# EAGLE board Power Board Rev A (EAGLE 6.5.0)
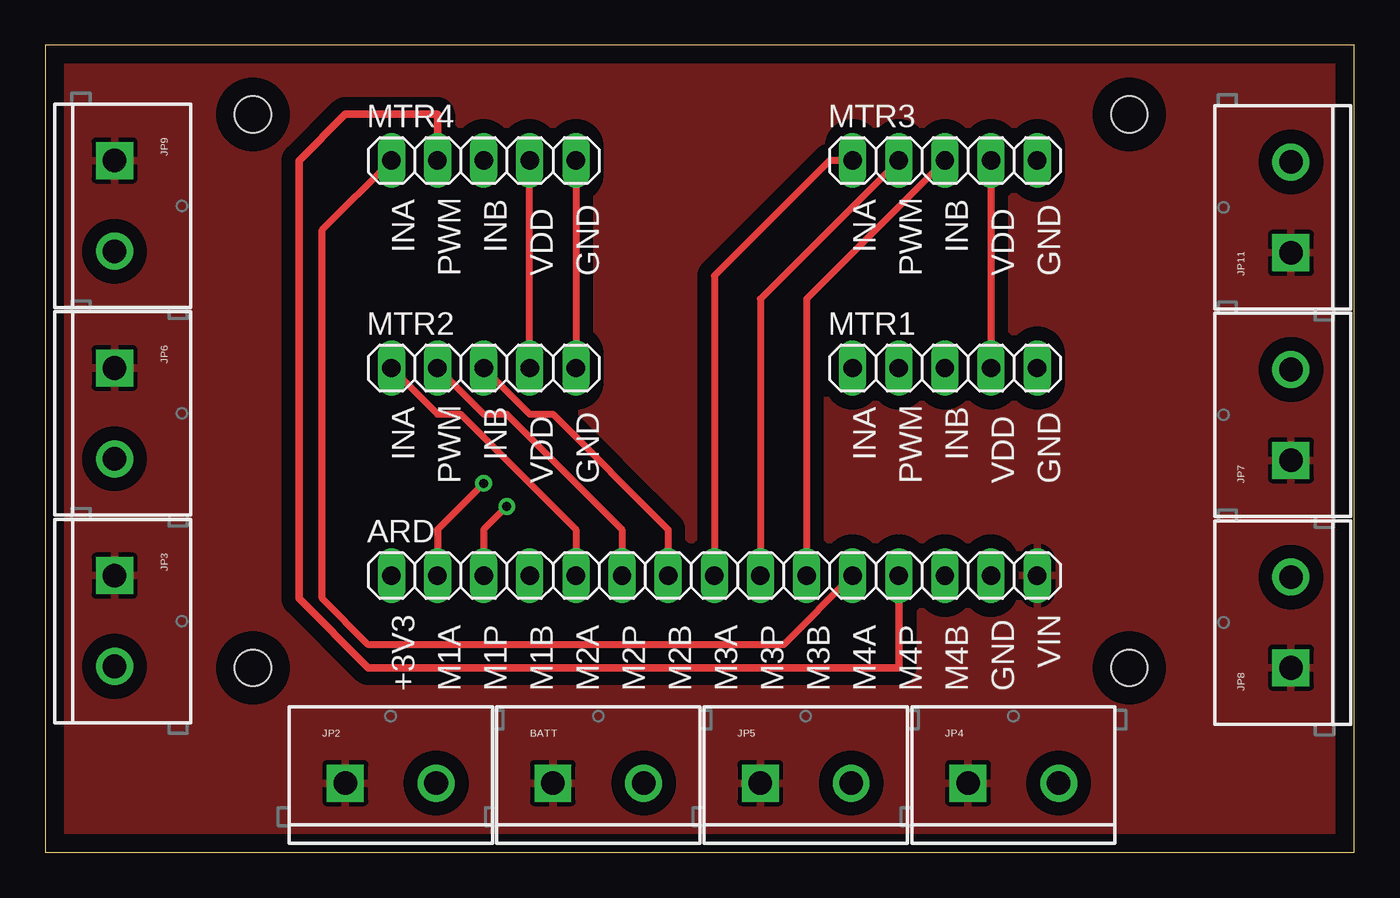
[diagram p0: board, top side]
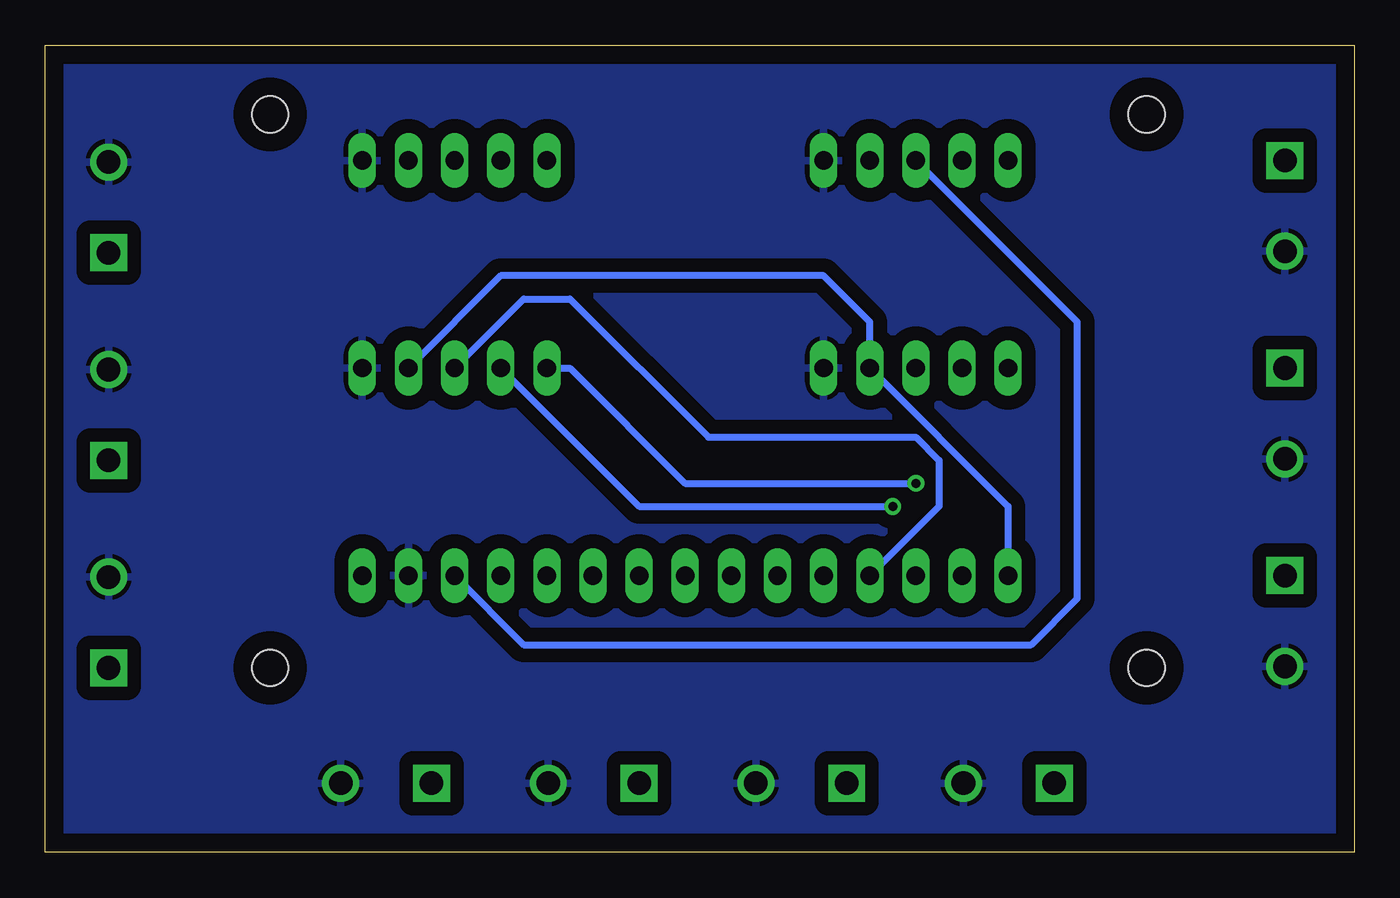
[diagram p1: board, bottom side, seen from below]

Size 72.06 x 44.44 mm. Coordinates in mm from the lower left corner, seen from the top.
Outline: 0,0 72.06,0 72.06,44.44 0,44.44 0,0
Copper layers (1*16): Top 0.035mm / dielectric 1.5mm / Bottom 0.035mm
Design rules "default *": minimum track width 10mil, minimum drill 20mil, track to track 8mil, track to pad 8mil, pad to pad 8mil, via to via 8mil, smd to smd 8mil, copper to edge 40mil, drill to drill 8mil, minimum pad ring 10mil, minimum via ring 8mil, stop-mask expansion 4mil, vias tented up to drill 0mil, thermal gap 10mil
Net classes: 0 High Power: width 6.35 mm, drill 8.89 mm, clearance 0.762 mm; 1 Data: width 0.381 mm, drill 0.508 mm, clearance 0.254 mm
Holes 2 mm at 11.43,40.64 59.69,40.64 11.43,10.16 59.69,10.16

## Footprints (pad centres in the part's own frame; a part is rotated, then mirrored left to right if it is on the bottom)
1X15 = drill 1.016 long: 1 -17.78,0; 2 -15.24,0; 3 -12.7,0; 4 -10.16,0; 5 -7.62,0; 6 -5.08,0; 7 -2.54,0; 8 0,0; 9 2.54,0; 10 5.08,0; 11 7.62,0; 12 10.16,0; 13 12.7,0; 14 15.24,0; 15 17.78,0
SCREWTERMINAL-5MM-2 = drill 1.3 pad 2.032 square: 1 0,0 | drill 1.3 pad 2.032: 2 5,0
1X05 = drill 1.016 long: 1 -5.08,0; 2 -2.54,0; 3 0,0; 4 2.54,0; 5 5.08,0

## Placement (x,y rotation side)
ARD  [1X15]  36.83,15.24 0 top
BATT  M025MM  [SCREWTERMINAL-5MM-2]  27.94,3.81 0 top
JP2  M025MM  [SCREWTERMINAL-5MM-2]  16.51,3.81 0 top
JP3  M025MM  [SCREWTERMINAL-5MM-2]  3.81,15.24 270 top
JP4  M025MM  [SCREWTERMINAL-5MM-2]  50.8,3.81 0 top
JP5  M025MM  [SCREWTERMINAL-5MM-2]  39.37,3.81 0 top
JP6  M025MM  [SCREWTERMINAL-5MM-2]  3.81,26.67 270 top
JP7  M025MM  [SCREWTERMINAL-5MM-2]  68.58,21.59 90 top
JP8  M025MM  [SCREWTERMINAL-5MM-2]  68.58,10.16 90 top
JP9  M025MM  [SCREWTERMINAL-5MM-2]  3.81,38.1 270 top
JP11  M025MM  [SCREWTERMINAL-5MM-2]  68.58,33.02 90 top
MTR1  [1X05]  49.53,26.67 0 top
MTR2  [1X05]  24.13,26.67 0 top
MTR3  [1X05]  49.53,38.1 0 top
MTR4  [1X05]  24.13,38.1 0 top

## Library data of the parts
ARD MTR1-MTR4 = pinhead
BATT JP2-JP9 JP11 = SparkFun-Connectors

## Nets
+3V3 [Data]: ARD.1 MTR1.4 MTR2.4 MTR3.4 MTR4.4
GND: ARD.14 BATT.2 JP2.2 JP3.2 JP4.2 JP5.2 JP6.2 JP7.2 JP8.2 JP9.2 JP11.2 MTR1.5 MTR2.5 MTR3.5 MTR4.5
N$1 [Data]: ARD.2 MTR1.1
N$2 [Data]: ARD.3 MTR1.2
N$3 [Data]: ARD.4 MTR1.3
N$4 [Data]: ARD.5 MTR2.1
N$5 [Data]: ARD.6 MTR2.2
N$6 [Data]: ARD.7 MTR2.3
N$7 [Data]: ARD.8 MTR3.1
N$8 [Data]: ARD.9 MTR3.2
N$9 [Data]: ARD.10 MTR3.3
N$10 [Data]: ARD.11 MTR4.1
N$12 [Data]: ARD.13 MTR4.3
S$1: ARD.12 MTR4.2
VCC: ARD.15 BATT.1 JP2.1 JP3.1 JP4.1 JP5.1 JP6.1 JP7.1 JP8.1 JP9.1 JP11.1

## Tracks (layer width: path | path; a pad name or v marks a point on that pad's centre or on a via)
+3V3
  Top 0.381: MTR3.4 MTR1.4 | MTR2.4 MTR4.4
  Bottom 0.381: ARD.1 19.05,19.05 MTR2.4 26.67,29.21 29.21,31.75 46.99,31.75 MTR1.4
GND
  Top 0.381: MTR4.5 MTR2.5
  pour Bottom: -2.54,57.15 74.93,57.15 74.93,-1.27 -2.54,-1.27
N$1  (via drill 0.51)
  Top 0.381: ARD.2 21.59,17.78 v24.13,20.32
  Bottom 0.381: v24.13,20.32 36.83,20.32 43.18,26.67 MTR1.1
N$2  (via drill 0.51)
  Top 0.381: ARD.3 24.13,17.78 v25.4,19.05
  Bottom 0.381: v25.4,19.05 39.37,19.05 MTR1.2
N$3
  Bottom 0.381: ARD.4 22.86,19.05 22.86,21.59 24.13,22.86 35.56,22.86 43.18,30.48 45.72,30.48 MTR1.3
N$4
  Top 0.381: ARD.5 29.21,17.78 22.86,24.13 21.59,24.13 MTR2.1
N$5
  Top 0.381: ARD.6 31.75,17.78 25.4,24.13 24.13,24.13 MTR2.2
N$6
  Top 0.381: ARD.7 34.29,17.78 27.94,24.13 26.67,24.13 MTR2.3
N$7
  Top 0.381: ARD.8 36.83,31.75 43.18,38.1 MTR3.1
N$8
  Top 0.381: ARD.9 39.37,30.48 MTR3.2
N$9
  Top 0.381: ARD.10 41.91,30.48 MTR3.3
N$10
  Top 0.381: MTR4.1 15.24,34.29 15.24,13.97 17.78,11.43 40.64,11.43 ARD.11
N$12
  Bottom 0.381: MTR4.3 15.24,29.21 15.24,13.97 17.78,11.43 45.72,11.43 ARD.13
S$1
  Top 0.406: ARD.12 46.99,10.16 17.78,10.16 13.97,13.97 13.97,38.1 16.51,40.64 21.59,40.64 MTR4.2
VCC
  pour Top: -5.08,57.15 78.74,57.15 78.74,-5.08 -5.08,-5.08

## Text on the board
tPlace: INA | INB | INA | INB | PWM | VDD | GND | PWM | VDD | GND | INA | INB | INA | INB | PWM | VDD | GND | PWM | VDD | GND | VIN | +3V3 | M1A | M1P | M1B | M2A | M2P | M2B | M3A | M3P | M3B | M4A | M4P | M4B | GND